# Allegro board P1_433C_Neaga_Laura-Gabriela.brd
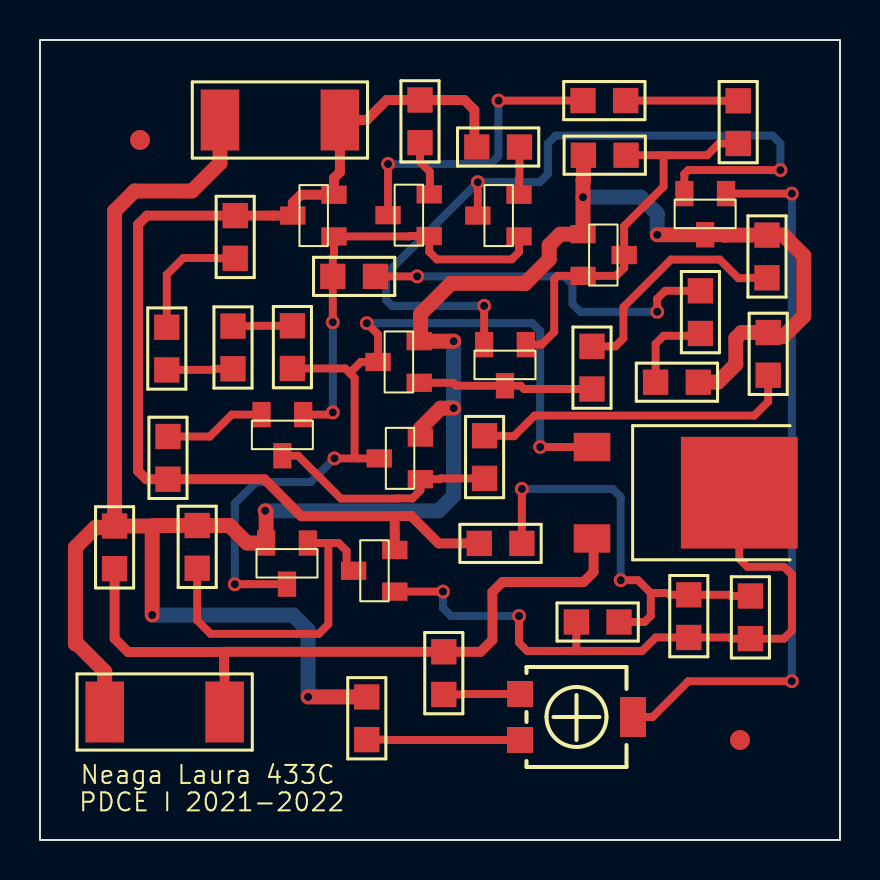
[diagram p0: board, top side]
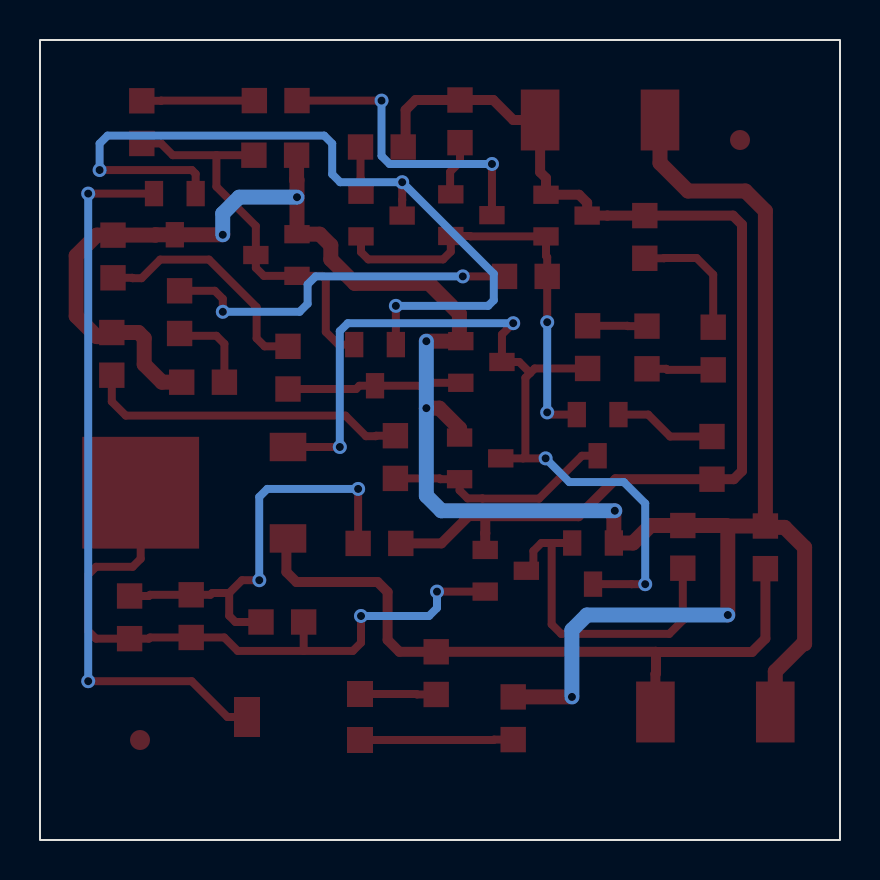
[diagram p1: board, bottom side, seen from below]

Outline 40 x 40 mm; copper layers: TOP, BOTTOM. Coordinates in mm from the lower left corner of the outline.
Outline path: rectangle 0,0 40,40

## Design rules (mm)
nets with their own width: min track width 0.4; nets N60000 N60012 N60142 N60306 N60310 N60316 N60334 N60418 N60464 N60490 N60542 N60604 N60684 N60690 N60802 N60954 N60972 N61018 N61028 N61060 N61396 N601021 N605301 N613661
nets with their own width: min track width 0.5; nets V+ VOUT
nets with their own width: min track width 0.75; nets GND

## Placement (name value [footprint] x y rotation side)
C1  4.7u  [SMC0805]  27.17 34.24 0 top
C2  4.7u  [SMC0805]  3.73 15.7 270 top
D2  BZX84-C2V7  [TO236AA]  14.7 30.18 0 top
D3  BZX84-C2V7  [TO236AA]  27.15 30.29 180 top
J1  CON2  [SMR2512]  9 36 0 top
J2  CON2  [SMR2512]  9.23 6.4 180 top
NOREF  -  [unnamed]  35 5 0 top
NOREF#2  -  [unnamed]  5 35 0 top
Q1  QBC807-25  [TO236AA]  19.46 30.2 0 top
Q2  QBC807-25  [TO236AA]  23.95 30.18 0 top
Q3  QBC807-25  [TO236AA]  24.29 24.77 90 top
Q4  QBC807-25  [TO236AA]  34.3 32.32 90 top
Q5  QBC817-25  [TO236AA]  18.96 22.86 0 top
Q6  QBC817-25  [TO236AA]  19.02 18.04 0 top
Q7  QBC807-25  [TO236AA]  13.16 21.27 90 top
Q8  QBC817-25  [TO236AA]  13.39 14.85 90 top
Q9  QBC807-25  [TO236AA]  17.74 12.42 0 top
Q10  QMJD31C  [SMDPAK]  27.6 19.65 270 top
R2  1.5k  [SMR0805]  14.64 28.18 0 top
R3  1.5k  [SMR0805]  33.02 27.46 270 top
R4  1.5k  [SMR0805]  30.78 22.89 0 top
R5  330  [SMR0805]  19 37 270 top
R6  1k  [SMR0805]  27.15 36.97 0 top
R7  1k  [SMR0805]  34.91 36.96 270 top
R8  470  [SMR0805]  27.6 22.55 90 top
R9  150  [SMR0805]  36.35 28.11 90 top
R10  1k  [SMR0805]  21.84 34.65 0 top
R11  680  [SMR0805]  9.76 31.22 270 top
R12  680  [SMR0805]  6.34 25.64 270 top
R13  680  [SMR0805]  9.65 23.56 90 top
R14  680  [SMR0805]  12.62 25.71 270 top
R15  3.9k  [SMR0805]  6.4 18.04 90 top
R16  910  [SMR0805]  22.23 18.08 90 top
R17  68  [SMR0805]  36.41 23.24 90 top
R18  4.7k  [SMR0805]  7.86 13.59 90 top
R19  1  [SMR0805]  21.96 14.83 0 top
R20  1  [SMR0805]  28.95 10.9 180 top
R21  1  [SMR0805]  35.52 12.2 270 top
R22  1  [SMR0805]  32.44 12.26 270 top
R23  15k  [SMR0805]  20.19 9.41 270 top
R24  5k  [TS53YL]  24 5 180 top
R25  3.9k  [SMR0805]  16.34 5.02 90 top

## Library data of the parts
C1 C2 = C
D2 = BZX84-C2V7_2
D3 = BZX84-C2V7_0
J1 J2 = CON2
Q1 = QBC807-25_1
Q2-Q4 Q7 Q9 = QBC807-25_0
Q5 Q6 = QBC817-25_0
Q8 = QBC817-25_1
Q10 = QMJD31C_3
R2-R23 R25 = R
R24 = POT_0

## Footprints (pads in the part's own frame, mm; a bottom-side part is the same pattern mirrored in y, then rotated)
SMC0805
  rect 1.27x1.27 smd: 1(0,0) 2(2.134,0)
SMDPAK
  rect 1.422x1.829 smd: 1(0,0) 3(4.572,0)
  rect 5.588x5.842 smd: 4(2.286,7.366)
SMR0805
  rect 1.27x1.27 smd: 1(0,0) 2(2.134,0)
SMR2512
  rect 1.93x3.048 smd: 1(0,0) 2(5.994,0)
TO236AA
  rect 1.27x0.914 smd: 1(0,0) 2(0,2.083) 3(-2.057,1.041)
TS53YL
  rect 1.3x1.3 smd: 1(0,0) 3(0,-2.3)
  rect 1.3x2 smd: 2(-5.65,-1.15)
unnamed
  round 1 smd: (0,0)

## Nets
GND: C1.1 C2.1 D3.1 J1.1 J2.2 Q4.3 Q5.2(E) Q6.2(E) Q8.2(E) R4.2 R9.2 R17.2 R18.2 R25.2
V+: D2.2 D2.3(C) J1.2 Q9.2(E) R5.1 R10.1 R11.1 R15.1 R19.1
VOUT: C2.2 J2.1 Q10.3(E) R23.1
N60000: R19.2 R20.1 R21.1 R22.1
N60012: Q9.1 Q10.4 R20.2 R21.2 R22.2
N60142: Q5.3 Q6.3 Q8.3 Q10.1 R14.2
N60306: D2.1 Q1.1 Q2.1 Q7.1 R2.1
N60310: Q1.2(E) R5.2
N60316: Q2.2(E) R10.2
N60334: Q7.2(E) R15.2
N60418: R12.2 R13.1
N60464: Q8.1 Q9.3 R18.1
N60490: Q1.3 R6.1
N60542: Q6.1 Q7.3 R16.1
N60604: Q2.3 Q3.2(E) Q4.2(E)
N60684: R6.2 R7.1
N60690: R23.2 R24.3
N60802: R2.2 R3.1
N60954: C1.2 D3.2 D3.3(C) Q3.1 R7.2
N60972: Q4.1 R24.2(T)
N61018: Q3.3 Q5.1 R8.1
N61028: R24.1 R25.1
N61060: R3.2 R4.1
N61396: R16.2 R17.1
N601021: R11.2 R12.1
N605301: R13.2 R14.1
N613661: R8.2 R9.1

## Via types
v1: diameter 0.7, hole 0.4, TOP to BOTTOM, 26 vias

## Routing (per net, layer and track width the routed paths; a pad name or vN(x,y) marks a point on that pad's centre or on a via; arc(x,y) is an arc through that point)
GND: length 124.7
  TOP w0.75: v1(11.26,16.46) 11.31,16.42 Q8.2 10.35,14.85 9.47,15.72 R18.2 5.69,15.72 5.67,15.7 ; 5.67,15.7 5.61,15.64 v1(5.61,11.25) ; 5.67,15.7 C2.1 ; C2.1 3.73,31.45 4.73,32.45 7.6,32.45 9,33.85 J1.1 ; C2.1 3.66,15.63 2.77,15.63 1.77,14.63 1.77,9.81 1.85,9.81 3.24,8.43 J2.2 ; 18.99,20.15 Q6.2 19.02,20.58 20.04,21.59 v1(20.68,21.59) ; R4.2 33.9,22.89 34.79,23.78 34.79,25.09 35.07,25.37 R17.2 36.61,25.17 37.16,25.17 38.19,26.2 38.19,29.22 37.16,30.24 R9.2 34.24,30.24 34.22,30.26 Q4.3 v1(30.86,30.26) ; 19.01,24.89 Q5.2 ; Q5.2 19.03,25.01 19.03,26.31 20.55,27.83 24.26,27.83 25.46,29.03 25.46,29.74 26.01,30.29 D3.1 v1(27.15,32.14) 27.15,32.99 27.17,33.01 C1.1 ; Q5.2 20.68,24.94 v1(20.68,24.94) ; R25.2 v1(13.4,7.15)
  BOTTOM w0.75: v1(30.86,30.26) 30.86,31.32 30.04,32.14 v1(27.15,32.14) ; v1(11.26,16.46) 19.93,16.46 20.68,17.21 v1(20.68,21.59) v1(20.68,24.94) ; v1(13.4,7.15) 13.4,10.5 12.65,11.25 v1(5.61,11.25)
V+: length 56.5
  TOP w0.5: Q9.2 17.74,15.34 17.74,15.34 17.74,16.08 ; R10.1 21.72,34.77 21.72,36.5 21.22,37 R5.1 17.34,37 16.34,36 J1.2 14.99,33.39 14.7,33.1 D2.2 13.05,32.26 12.64,31.86 D2.3 11.63,31.22 11.63,31.22 R11.1 5.35,31.22 4.9,30.77 4.9,18.45 5.31,18.04 R15.1 11.22,18.04 13.07,16.19 17.62,16.19 17.74,16.08 ; R19.1 19.93,14.83 18.56,16.2 17.86,16.2 17.74,16.08
VOUT: length 35.5
  TOP w0.5: 9.2,9.4 9.21,9.41 R23.1 22.03,9.41 22.62,10 22.62,12.4 23.12,12.9 27.18,12.9 27.68,13.4 27.68,15 Q10.3 ; 9.2,9.4 4.4,9.4 3.73,10.07 C2.2 ; 9.2,9.4 9.2,8.33 9.23,8.3 J2.1
N60000: length 21.7
  TOP w0.4: 30.54,12.35 29.9,12.99 v1(29.04,12.99) ; 30.54,12.35 30.54,11.21 30.23,10.9 R20.1 ; 30.54,12.35 31.39,12.35 31.48,12.26 R22.1 34.5,12.26 34.56,12.2 R21.1 ; R19.2 v1(24.09,17.55)
  BOTTOM w0.4: v1(29.04,12.99) 29.04,17.15 28.64,17.55 v1(24.09,17.55)
N60012: length 33.3
  TOP w0.4: v1(23.95,11.2) 23.95,9.86 24.36,9.45 26.82,9.45 ; Q9.1 v1(20.15,12.42) ; R20.2 26.82,9.45 ; 26.82,9.45 30.11,9.45 30.79,10.13 R22.2 34.5,10.13 34.56,10.07 R21.2 37.2,10.07 37.6,10.47 37.6,13.26 37.2,13.66 35.37,13.66 34.97,14.06 Q10.4
  BOTTOM w0.4: v1(20.15,12.42) 20.15,11.6 20.55,11.2 v1(23.95,11.2)
N60142: length 43.2
  TOP w0.4: 15.85,19.08 15.73,19.2 15.73,23.11 15.49,23.35 ; 15.85,19.08 v1(14.72,19.08) ; 15.85,19.08 Q6.3 16.94,19.1 ; v1(9.74,12.79) 10.42,12.79 10.42,12.79 Q8.3 ; 15.49,23.35 15.27,23.58 R14.2 ; 15.49,23.35 16.04,23.9 Q5.3 16.9,25.28 v1(16.34,25.84) ; Q10.1 v1(25.01,19.65)
  BOTTOM w0.4: v1(16.34,25.84) 24.61,25.84 25.01,25.44 v1(25.01,19.65) ; v1(9.74,12.79) 9.74,16.83 10.81,17.9 13.53,17.9 v1(14.72,19.08)
N60306: length 21.5
  TOP w0.4: v1(14.64,21.38) 14.53,21.27 Q7.1 ; Q2.1 23.95,29.4 23.58,29.03 19.85,29.03 19.46,29.42 Q1.1 18.5,30.2 18.48,30.18 D2.1 14.7,29.2 14.64,29.14 R2.1 v1(14.64,25.89)
  BOTTOM w0.4: v1(14.64,21.38) v1(14.64,25.89)
N60310: length 2.8
  TOP w0.4: R5.2 19,33.9 19.49,33.41 19.49,32.32 Q1.2
N60316: length 2.4
  TOP w0.4: Q2.2 23.95,33.05 23.97,33.07 R10.2
N60334: length 5.1
  TOP w0.4: R15.2 8.49,20.17 9.59,21.27 Q7.2
N60418: length 3.3
  TOP w0.4: R13.1 8.69,23.56 8.63,23.51 R12.2
N60464: length 16.9
  TOP w0.4: 14.42,14.85 14.93,14.85 15.33,14.45 15.33,13.81 Q9.3 ; 14.42,14.85 14.42,10.78 13.94,10.31 8.53,10.31 7.86,10.98 R18.1 ; 14.42,14.85 Q8.1
N60490: length 15.2
  TOP w0.4: v1(22.92,36.97) R6.1 ; Q1.3 v1(17.4,33.8)
  BOTTOM w0.4: v1(22.92,36.97) 22.92,34.2 22.52,33.8 v1(17.4,33.8)
N60542: length 11.7
  TOP w0.4: Q7.3 12.9,19.21 15.05,17.07 17.87,17.07 17.88,17.08 18.62,17.08 19.02,17.48 Q6.1 19.98,18.04 20.02,18.08 R16.1
N60604: length 40.8
  TOP w0.4: Q3.2 v1(22.21,26.71) ; v1(21.89,32.89) 21.89,32.01 21.89,32.01 Q2.3 ; v1(37.02,33.5) 32.41,33.5 32.22,33.31 Q4.2
  BOTTOM w0.4: v1(22.21,26.71) 17.59,26.71 17.31,26.99 17.31,28.31 v1(21.89,32.89) 24.99,32.89 25.39,33.29 25.39,34.82 25.79,35.22 36.62,35.22 37.02,34.82 v1(37.02,33.5)
N60684: length 5.6
  TOP w0.4: R7.1 33.95,36.96 33.94,36.97 R6.2
N60690: length 3.8
  TOP w0.4: R23.2 21.15,7.28 21.18,7.3 R24.3
N60802: length 18.4
  TOP w0.4: v1(30.86,26.41) 30.86,27.06 31.26,27.46 R3.1 ; v1(18.86,28.18) R2.2
  BOTTOM w0.4: v1(18.86,28.18) 26.22,28.18 26.62,27.78 26.62,26.81 27.02,26.41 v1(30.86,26.41)
N60954: length 20.4
  TOP w0.4: 31.18,34.24 31.18,32.67 29.21,30.7 D3.3 29.21,28.61 28.81,28.21 D3.2 25.87,28.21 25.71,28.04 25.71,25.41 25.07,24.77 Q3.1 ; 31.18,34.24 33.36,34.24 33.95,34.83 R7.2 ; 31.18,34.24 C1.2
N60972: length 36.4
  TOP w0.4: v1(37.59,7.94) 32.42,7.94 30.63,6.15 R24.2 ; Q4.1 v1(37.59,32.32)
  BOTTOM w0.4: v1(37.59,32.32) v1(37.59,7.94)
N61018: length 8.8
  TOP w0.4: R8.1 24.2,22.55 24.03,22.71 Q3.3 20.8,22.71 20.65,22.86 Q5.1
N61028: length 7.7
  TOP w0.4: R25.1 17.3,5.02 17.32,5 R24.1
N61060: length 4.4
  TOP w0.4: R3.2 32.9,25.21 31.18,25.21 30.78,24.81 R4.1
N61396: length 16.2
  TOP w0.4: R16.2 23.19,20.21 23.22,20.19 23.7,20.19 24.73,21.22 35.71,21.22 36.41,21.92 R17.1
N601021: length 6.4
  TOP w0.4: R12.1 6.34,28.27 7.17,29.1 8.78,29.1 8.8,29.09 R11.2
N605301: length 3
  TOP w0.4: R14.1 10.63,25.71 10.61,25.69 R13.2
N613661: length 11.9
  TOP w0.4: R8.2 28.77,24.68 29.17,25.08 29.17,26.64 31.55,29.02 33.99,29.02 34.92,28.09 35.37,28.09 35.39,28.11 R9.1

## Text on the board
Ref Des/Silkscreen Top: PDCE I 2021-2022 | Neaga Laura 433C
XSECTION_CHART: *  SURFACE - AIR 0 MM | L1 TOP CONDUCTOR - COPPER 0.03048 MM | *  DIELECTRIC - FR-4 0.2032 MM | L2 BOTTOM CONDUCTOR - COPPER 0.03048 MM | DESIGN CROSS SECTION CHART | ___________________________ | TOTAL THICKNESS 0.26416 MM | 1-2
NCLEGEND-1-2: FIGURE | FINISHED_SIZE | 0.4 | DRILL CHART: TOP to BOTTOM | ALL UNITS ARE IN MILLIMETERS | PLATED | QTY | 26
